# EAGLE board test_stmsize (EAGLE 6.6.0)
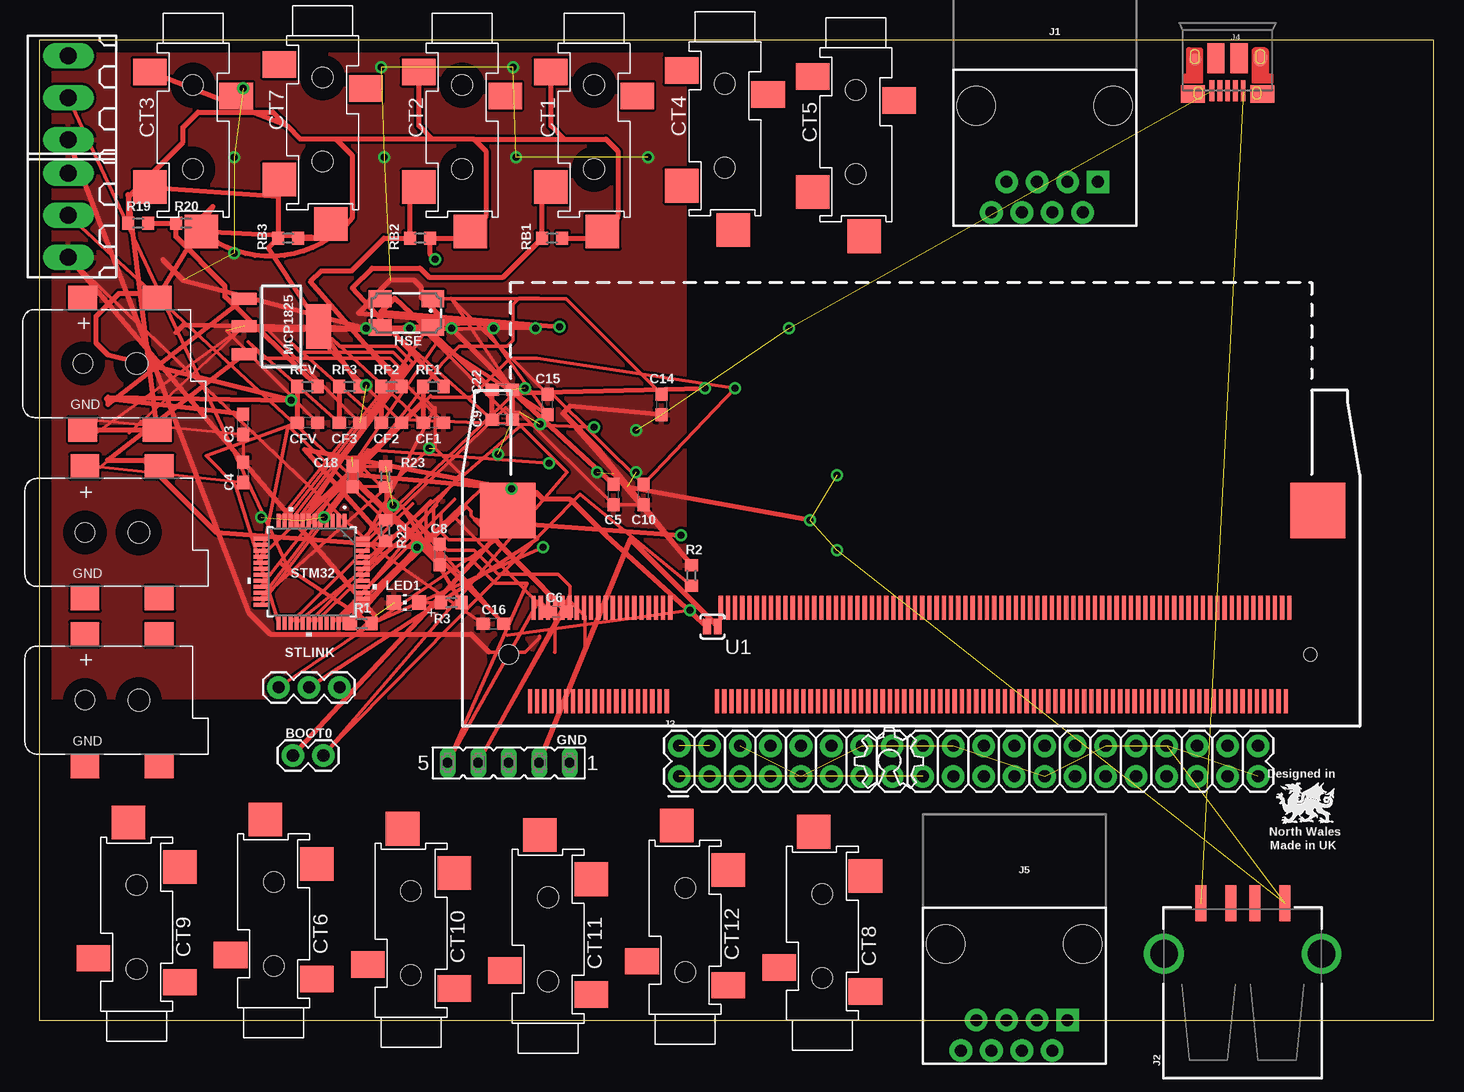
[diagram p0: board, top side]
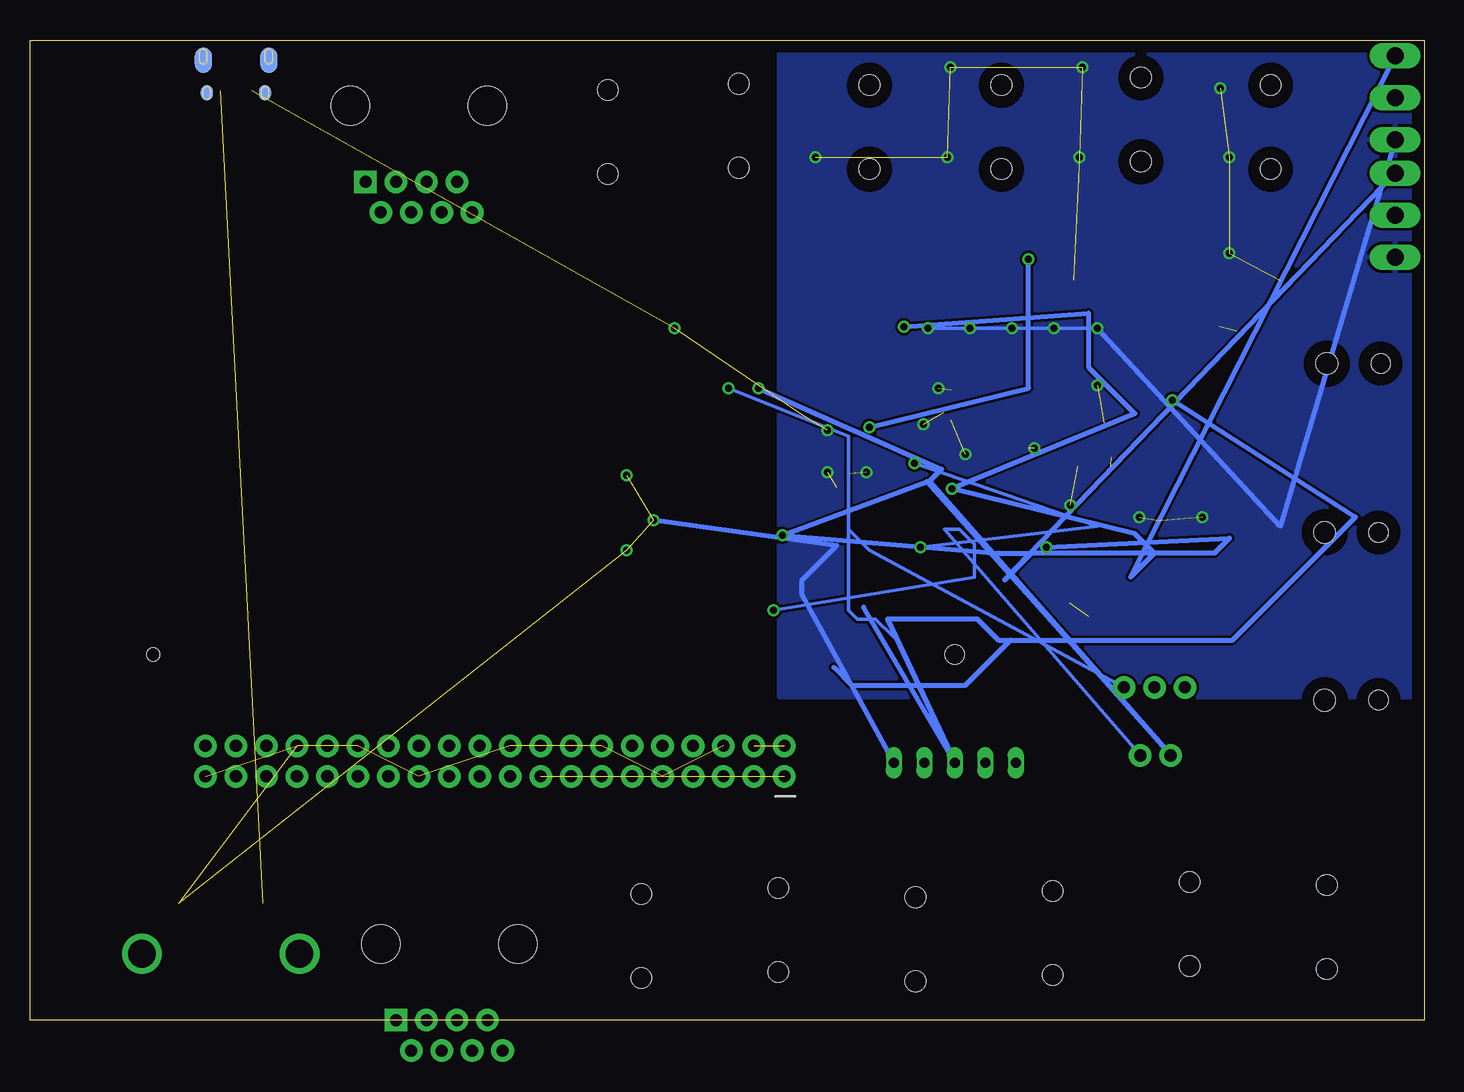
[diagram p1: board, bottom side, seen from below]

Size 116.23 x 81.67 mm. Coordinates in mm from the lower left corner, seen from the top.
Outline: 0,0 116.23,0 116.23,81.67 0,81.67 0,0
Copper layers (1*16): Top 0.035mm / dielectric 1.5mm / Bottom 0.035mm
Design rules "default *": minimum track width 10mil, minimum drill 24mil, track to track 8mil, track to pad 8mil, pad to pad 8mil, via to via 8mil, smd to smd 8mil, copper to edge 40mil, drill to drill 8mil, minimum pad ring 10mil, minimum via ring 8mil, stop-mask expansion 4mil, vias tented up to drill 0.6mm, thermal gap 10mil
Net classes: 0 default: width 0.203 mm, drill 0.6 mm, clearance 0.203 mm; 1 power: width 0.381 mm, drill 0.6 mm, clearance 0.254 mm; 2 gnd: width 0.254 mm, drill 0.6 mm, clearance 0.254 mm

## Footprints (pad centres in the part's own frame; a part is rotated, then mirrored left to right if it is on the bottom)
1X02 = drill 1.016 pad 1.88: 1 0,0; 2 2.54,0
C0603 = smd 1.1 x 1: 1 -0.85,0; 2 0.85,0
STEREO_SMT = smd 2.8 x 2.2: P$1 -3.6,-2.4; P$3 3.6,-4.4 | smd 2.8 x 2.8: P$2 -3.6,-12; P$4 0.7,-15.7 | hole 1.7: 0,-3.5; 0,-10.5
180-3 = drill 1.422 long: 1 -3.5,0; 2 0,0; 3 3.5,0
FE05-1 = drill 0.813 long: 1 -5.08,0; 2 -2.54,0; 3 0,0; 4 2.54,0; 5 5.08,0
CTS406 = smd 1.9 x 1.4: 1 -2.2,-1.2; 2 2.2,-1.2; 3 2.2,1.2; 4 -2.2,1.2
RJ45-8 = drill 1 pad 1.88 square: 1 -4.445,6.35 | drill 1 pad 1.88: 2 -3.175,8.89; 3 -1.905,6.35; 4 -0.635,8.89; 5 0.635,6.35; 6 1.905,8.89; 7 3.175,6.35; 8 4.445,8.89 | hole 3.2: -5.715,0; 5.715,0
USB-A-S-SILK-FEMALE = smd 3 x 0.9: D+ 7.212,-1; D- 7.212,1; GND 7.212,-3.5; VBUS 7.212,3.5 | drill 2.311: SHLD1 3,-6.566; SHLD2 3,6.566
2X20 = drill 1.016 pad 1.88: 1 0,0; 2 0,2.54; 3 2.54,0; 4 2.54,2.54; 5 5.08,0; 6 5.08,2.54; 7 7.62,0; 8 7.62,2.54; 9 10.16,0; 10 10.16,2.54; 11 12.7,0; 12 12.7,2.54; 13 15.24,0; 14 15.24,2.54; 15 17.78,0; 16 17.78,2.54; 17 20.32,0; 18 20.32,2.54; 19 22.86,0; 20 22.86,2.54; 21 25.4,0; 22 25.4,2.54; 23 27.94,0; 24 27.94,2.54; 25 30.48,0; 26 30.48,2.54; 27 33.02,0; 28 33.02,2.54; 29 35.56,0; 30 35.56,2.54; 31 38.1,0; 32 38.1,2.54; 33 40.64,0; 34 40.64,2.54; 35 43.18,0; 36 43.18,2.54; 37 45.72,0; 38 45.72,2.54; 39 48.26,0; 40 48.26,2.54
USB-MICROB-PTH-MILL = smd 0.4 x 1.75: D+ 0,0; D- -0.65,0; GND 1.3,0; ID 0.65,0; VBUS -1.3,0 | smd 2 x 1.46: SHIELD -2.9,0.275; SHIELD2 2.9,0.275 | smd 1.425 x 2.5: SHIELD3 -0.963,-2.675; SHIELD4 0.963,-2.675 | smd 1.4 x 2.1 bottom: SHIELD5 -2.731,-2.531; SHIELD7 2.729,-2.531 | smd 1 x 1: SHIELD6 2.7,-2.575 | smd 1.1 x 1.5: SHIELD8 -2.731,-2.731 | smd 1 x 1.3 bottom: SHIELD9 -2.43,0.195; SHIELD10 2.43,0.195
CHIP-LED0805 = smd 1.2 x 1.2: A 0,-1.05; C 0,1.05
SOT-223 = smd 1 x 2.1: 1 -2.3,-3.1; 2 0,-3.1; 3 2.3,-3.1 | smd 3.7 x 2.1: 4 0,3.1
R0603 = smd 1 x 1.1: 1 -0.85,0; 2 0.85,0
SJ_2S-NO = smd 0.635 x 1.27: 1 -0.45,0; 2 0.45,0
1X03 = drill 1.016 pad 1.88: 1 0,0; 2 2.54,0; 3 5.08,0
LQFP48-7X7MM = smd 1.194 x 0.305: 1 -4.25,2.75; 2 -4.25,2.25; 3 -4.25,1.75; 4 -4.25,1.25; 5 -4.25,0.75; 6 -4.25,0.25; 7 -4.25,-0.25; 8 -4.25,-0.75; 9 -4.25,-1.25; 10 -4.25,-1.75; 11 -4.25,-2.25; 12 -4.25,-2.75; 25 4.25,-2.75; 26 4.25,-2.25; 27 4.25,-1.75; 28 4.25,-1.25; 29 4.25,-0.75; 30 4.25,-0.25; 31 4.25,0.25; 32 4.25,0.75; 33 4.25,1.25; 34 4.25,1.75; 35 4.25,2.25; 36 4.25,2.75 | smd 0.305 x 1.194: 13 -2.75,-4.25; 14 -2.25,-4.25; 15 -1.75,-4.25; 16 -1.25,-4.25; 17 -0.75,-4.25; 18 -0.25,-4.25; 19 0.25,-4.25; 20 0.75,-4.25; 21 1.25,-4.25; 22 1.75,-4.25; 23 2.25,-4.25; 24 2.75,-4.25; 37 2.75,4.25; 38 2.25,4.25; 39 1.75,4.25; 40 1.25,4.25; 41 0.75,4.25; 42 0.25,4.25; 43 -0.25,4.25; 44 -0.75,4.25; 45 -1.25,4.25; 46 -1.75,4.25; 47 -2.25,4.25; 48 -2.75,4.25
SO-DIMM = smd 0.35 x 2: 1 -26.4,-3.9; 2 -26.1,3.9; 3 -25.8,-3.9; 4 -25.5,3.9; 5 -25.2,-3.9; 6 -24.9,3.9; 7 -24.6,-3.9; 8 -24.3,3.9; 9 -24,-3.9; 10 -23.7,3.9; 11 -23.4,-3.9; 12 -23.1,3.9; 13 -22.8,-3.9; 14 -22.5,3.9; 15 -22.2,-3.9; 16 -21.9,3.9; 17 -21.6,-3.9; 18 -21.3,3.9; 19 -21,-3.9; 20 -20.7,3.9; 21 -20.4,-3.9; 22 -20.1,3.9; 23 -19.8,-3.9; 24 -19.5,3.9; 25 -19.2,-3.9; 26 -18.9,3.9; 27 -18.6,-3.9; 28 -18.3,3.9; 29 -18,-3.9; 30 -17.7,3.9; 31 -17.4,-3.9; 32 -17.1,3.9; 33 -16.8,-3.9; 34 -16.5,3.9; 35 -16.2,-3.9; 36 -15.9,3.9; 37 -15.6,-3.9; 38 -15.3,3.9; 39 -15,-3.9; 40 -14.7,3.9; 41 -10.8,-3.9; 42 -10.5,3.9; 43 -10.2,-3.9; 44 -9.9,3.9; 45 -9.6,-3.9; 46 -9.3,3.9; 47 -9,-3.9; 48 -8.7,3.9; 49 -8.4,-3.9; 50 -8.1,3.9; 51 -7.8,-3.9; 52 -7.5,3.9; 53 -7.2,-3.9; 54 -6.9,3.9; 55 -6.6,-3.9; 56 -6.3,3.9; 57 -6,-3.9; 58 -5.7,3.9; 59 -5.4,-3.9; 60 -5.1,3.9; 61 -4.8,-3.9; 62 -4.5,3.9; 63 -4.2,-3.9; 64 -3.9,3.9; 65 -3.6,-3.9; 66 -3.3,3.9; 67 -3,-3.9; 68 -2.7,3.9; 69 -2.4,-3.9; 70 -2.1,3.9; 71 -1.8,-3.9; 72 -1.5,3.9; 73 -1.2,-3.9; 74 -0.9,3.9; 75 -0.6,-3.9; 76 -0.3,3.9; 77 0,-3.9; 78 0.3,3.9; 79 0.6,-3.9; 80 0.9,3.9; 81 1.2,-3.9; 82 1.5,3.9; 83 1.8,-3.9; 84 2.1,3.9; 85 2.4,-3.9; 86 2.7,3.9; 87 3,-3.9; 88 3.3,3.9; 89 3.6,-3.9; 90 3.9,3.9; 91 4.2,-3.9; 92 4.5,3.9; 93 4.8,-3.9; 94 5.1,3.9; 95 5.4,-3.9; 96 5.7,3.9; 97 6,-3.9; 98 6.3,3.9; 99 6.6,-3.9; 100 6.9,3.9; 101 7.2,-3.9; 102 7.5,3.9; 103 7.8,-3.9; 104 8.1,3.9; 105 8.4,-3.9; 106 8.7,3.9; 107 9,-3.9; 108 9.3,3.9; 109 9.6,-3.9; 110 9.9,3.9; 111 10.2,-3.9; 112 10.5,3.9; 113 10.8,-3.9; 114 11.1,3.9; 115 11.4,-3.9; 116 11.7,3.9; 117 12,-3.9; 118 12.3,3.9; 119 12.6,-3.9; 120 12.9,3.9; 121 13.2,-3.9; 122 13.5,3.9; 123 13.8,-3.9; 124 14.1,3.9; 125 14.4,-3.9; 126 14.7,3.9; 127 15,-3.9; 128 15.3,3.9; 129 15.6,-3.9; 130 15.9,3.9; 131 16.2,-3.9; 132 16.5,3.9; 133 16.8,-3.9; 134 17.1,3.9; 135 17.4,-3.9; 136 17.7,3.9; 137 18,-3.9; 138 18.3,3.9; 139 18.6,-3.9; 140 18.9,3.9; 141 19.2,-3.9; 142 19.5,3.9; 143 19.8,-3.9; 144 20.1,3.9; 145 20.4,-3.9; 146 20.7,3.9; 147 21,-3.9; 148 21.3,3.9; 149 21.6,-3.9; 150 21.9,3.9; 151 22.2,-3.9; 152 22.5,3.9; 153 22.8,-3.9; 154 23.1,3.9; 155 23.4,-3.9; 156 23.7,3.9; 157 24,-3.9; 158 24.3,3.9; 159 24.6,-3.9; 160 24.9,3.9; 161 25.2,-3.9; 162 25.5,3.9; 163 25.8,-3.9; 164 26.1,3.9; 165 26.4,-3.9; 166 26.7,3.9; 167 27,-3.9; 168 27.3,3.9; 169 27.6,-3.9; 170 27.9,3.9; 171 28.2,-3.9; 172 28.5,3.9; 173 28.8,-3.9; 174 29.1,3.9; 175 29.4,-3.9; 176 29.7,3.9; 177 30,-3.9; 178 30.3,3.9; 179 30.6,-3.9; 180 30.9,3.9; 181 31.2,-3.9; 182 31.5,3.9; 183 31.8,-3.9; 184 32.1,3.9; 185 32.4,-3.9; 186 32.7,3.9; 187 33,-3.9; 188 33.3,3.9; 189 33.6,-3.9; 190 33.9,3.9; 191 34.2,-3.9; 192 34.5,3.9; 193 34.8,-3.9; 194 35.1,3.9; 195 35.4,-3.9; 196 35.7,3.9; 197 36,-3.9; 198 36.3,3.9; 199 36.6,-3.9; 200 36.9,3.9 | smd 4.6 x 4.6: G1 -28.254,12; G2 39.27,12 | hole 1.6: -28.15,0 | hole 1.1: 38.65,0
DCJACK_2MM_SMT = smd 2.4 x 2: GND 0,-5.5; GNDBREAK 6.2,-5.5; PWR1 0,5.5; PWR2 6.2,5.5 | hole 1.6: 0,0 | hole 1.8: 4.5,0

## Placement (x,y rotation side)
BOOT0  [1X02]  23.68,22.06 180 top
C3  4.7uF  [C0603]  16.99,49.65 90 top
C4  4.7uF  [C0603]  16.99,45.65 270 top
C5  100nF  [C0603]  47.87,43.8 90 top
C6  100nF  [C0603]  43.12,34.05 0 top
C8  100nF  [C0603]  33.37,38.8 270 top
C9  100nF  [C0603]  38.62,50.05 180 top
C10  100nF  [C0603]  50.37,43.8 90 top
C14  18pF  [C0603]  51.87,51.3 270 top
C15  18pF  [C0603]  42.37,51.3 90 top
C16  100nF  [C0603]  37.87,33.05 0 top
C18  10uF  [C0603]  26.12,45.3 270 top
C22  1uF  [C0603]  38.62,52.55 180 top
CF1  100nF  [C0603]  32.87,49.8 180 top
CF2  100nF  [C0603]  29.37,49.8 180 top
CF3  100nF  [C0603]  25.87,49.8 180 top
CFV  100nF  [C0603]  22.37,49.8 180 top
CT1  STEREO_SMD  [STEREO_SMT]  46.25,81.42 0 top
CT2  STEREO_SMD  [STEREO_SMT]  35.25,81.42 0 top
CT3  STEREO_SMD  [STEREO_SMT]  12.82,81.42 0 top
CT4  STEREO_SMD  [STEREO_SMT]  57.15,81.53 0 top
CT5  STEREO_SMD  [STEREO_SMT]  68.07,81.03 0 top
CT6  STEREO_SMD  [STEREO_SMT]  19.56,1.02 180 top
CT7  STEREO_SMD  [STEREO_SMT]  23.62,82.04 0 top
CT8  STEREO_SMD  [STEREO_SMT]  65.28,0 180 top
CT9  STEREO_SMD  [STEREO_SMT]  8.13,0.76 180 top
CT10  STEREO_SMD  [STEREO_SMT]  30.99,0.25 180 top
CT11  STEREO_SMD  [STEREO_SMT]  42.42,-0.25 180 top
CT12  STEREO_SMD  [STEREO_SMT]  53.85,0.51 180 top
DS18B20  [180-3]  2.43,76.88 90 top
GND  UART  [FE05-1]  39.13,21.45 180 top
HSE  8MHZ  [CTS406]  30.61,58.92 180 top
J1  RJ45  [RJ45-8]  83.82,76.2 180 top
J2  USB_A_SMT_FEMALE  [USB-A-S-SILK-FEMALE]  100.33,2.54 90 top
J3  RASPBERRYPI-40-PIN-GPIO_PTH_NO_SHROUD  [2X20]  53.34,20.32 0 top
J4  [USB-MICROB-PTH-MILL]  99.06,77.47 180 top
J5  RJ45  [RJ45-8]  81.28,6.35 180 top
LED1  Red 1.85V  [CHIP-LED0805]  30.62,34.8 90 top
LOGO1  OSHW_LOGO_6MILX0200-NT  [OSHW_6X200_NOTEXT]  68.02,19.33 0 top
MCP1825  MCP1825SOT-223-3  [SOT-223]  20.18,57.81 270 top
PULSE  [180-3]  2.43,67.06 90 top
R1  4.7k  [R0603]  26.87,33.05 180 top
R2  10k  [R0603]  54.37,37.05 90 top
R3  1K  [R0603]  34.37,34.8 0 top
R19  10k  [R0603]  8.25,66.42 180 top
R20  120k  [R0603]  12.25,66.42 180 top
R22  10k  [R0603]  28.87,40.8 270 top
R23  10k  [R0603]  28.87,45.3 270 top
RB1  22r  [R0603]  42.75,65.17 0 top
RB2  22r  [R0603]  31.75,65.17 0 top
RB3  22r  [R0603]  20.75,65.17 0 top
RF1  330R  [R0603]  32.87,52.8 180 top
RF2  330R  [R0603]  29.37,52.8 180 top
RF3  330R  [R0603]  25.87,52.8 180 top
RFV  330R  [R0603]  22.37,52.8 180 top
SJ1  SOLDERJUMPERNO  [SJ_2S-NO]  56.12,32.8 180 top
STLINK  [1X03]  19.95,27.74 0 top
STM32  STM32F302_303C2  [LQFP48-7X7MM]  22.71,37.37 270 top
U1  COMPUTE_MODULE  [SO-DIMM]  67.31,30.48 0 top
U$1  2.1MMJACKSMT  [DCJACK_2MM_SMT]  3.63,54.72 0 top
U$2  2.1MMJACKSMT  [DCJACK_2MM_SMT]  3.81,40.64 0 top
U$3  2.1MMJACKSMT  [DCJACK_2MM_SMT]  3.81,26.67 0 top

## Library data of the parts
BOOT0 SJ1 STLINK = SparkFun
C3-C6 C8-C10 C14-C16 C18 C22 CF1-CF3 CFV R1 R2 R19 R20 R22 R23 RB1-RB3 RF1-RF3 RFV = resistor
CT1-CT12 = IotaWatt_parts
DS18B20 PULSE = con-weidmueller-sl35; OC_FARNELL: unknown; OC_NEWARK: unknown
GND = con-lsta; OC_FARNELL: unknown; OC_NEWARK: unknown
HSE = crystal; OC_FARNELL: unknown; OC_NEWARK: unknown
J1 J5 = SparkFun-Connectors; PROD_ID: CONN-08506; SF_ID: PRT-00643
J2 = SparkFun-Connectors; PROD_ID: CONN-09520; SF_ID: PRT-09011
J3 = SparkFun-Connectors
J4 = SparkFun-Connectors; PROD_ID: CONN-13711
LED1 U$1-U$3 = adafruit
LOGO1 = ohw-logo
MCP1825 = SteelCaveRobotics-Power
R3 = rcl
STM32 = stm32f303cb; MANUFACTURER_PART_NUMBER: stm32f302_303c2; VENDOR: STMicroelectronics
U1 = raspberrypi_cm

## Nets
3.3V: J3.1 J3.17
5V: J3.2 J3.4
+3V3: BOOT0.2 C4.2 C5.2 C6.2 C8.2 C9.2 C22.2 DS18B20.3 MCP1825.3 PULSE.3 R1.2 R22.2 SJ1.2 STM32.9 STM32.24 STM32.36 STM32.48
+5V: C3.2 GND.3 MCP1825.1
AC: R20.1 U$1.PWR2
ADC0: R19.1 R20.2 RFV.1
BIAS: CT1.P$1 CT1.P$4 CT2.P$1 CT2.P$4 CT3.P$1 CT3.P$4 R19.2 RB1.2 RB2.2 RB3.2 STM32.16 U$1.GND U$1.GNDBREAK
BIAS_IN: C18.2 R22.1 R23.2 STM32.17
BOOT0: BOOT0.1 R2.1 STM32.44
CT1: CF1.2 RF1.2 STM32.10
CT2: CF2.2 RF2.2 STM32.11
CT3: CF3.2 RF3.2 STM32.12
DS18B20: DS18B20.2 R1.1 STM32.21
GND: C3.1 C4.1 C5.1 C6.1 C8.1 C9.1 C10.1 C14.2 C15.2 C16.1 C18.1 C22.1 CF1.1 CF2.1 CF3.1 CFV.1 DS18B20.1 GND.1 J2.GND J3.6 J3.9 J3.14 J3.20 J3.25 J3.30 J3.34 J3.39 J4.GND LED1.C MCP1825.2 PULSE.1 R2.2 R23.1 STM32.8 STM32.23 STM32.35 STM32.47
HSE_IN: C14.1 HSE.1 STM32.5
HSE_OUT: C15.1 HSE.3 STM32.6
LED: R3.2 STM32.27
LSE_IN: STM32.3
LSE_OUT: STM32.4
N$1: GND.2 SJ1.1
N$2: CT1.P$2 RB1.1 RF1.1
N$8: CT2.P$2 RB2.1 RF2.1
N$10: CT3.P$2 RB3.1 RF3.1
N$41: LED1.A R3.1
NRST: C10.2 STLINK.3 STM32.7
PULSE: C16.2 PULSE.2 STM32.28
SWCLK: STLINK.2 STM32.37
SWDIO: STLINK.1 STM32.34
UART_RX: GND.4 STM32.31
UART_TX: GND.5 STM32.30
VBAT: STM32.1
VBUS: J2.VBUS J4.VBUS
VSIG: CFV.2 RFV.2 STM32.25

## Tracks (layer width: path | path; a pad name or v marks a point on that pad's centre or on a via)
3.3V  (1 unrouted)
5V  (1 unrouted)
+3V3  (via drill 0.6)
  Top 0.254: C4.2 5.1,46.07 MCP1825.3
  Top 0.305: STM32.9 31.62,55.3 30.15,56.77 C9.2 | STM32.36 35.62,42.8 36,42.42 36,42.02 C6.2 | STM32.48 38.88,51.55 39.25,51.92 | C5.2 39.88,51.92 40.25,52.28 | STM32.24 27.12,46.05 26.75,45.67 25.85,45.67 C8.2
  Top 0.406: MCP1825.3 5.7,46.67 8.75,46.67 14.75,40.67 v31.49,39.4 R1.2 | C8.2 25.73,45.55 v39.37,44.28 22.1,47.57 R22.2 | v43.37,57.78 28.5,59.05 29.62,60.17 C22.2 C9.2 | 40.25,52.28 v55.49,52.65 | BOOT0.2 41.46,43.96 42,43.42 44.25,43.42 47.25,40.42 SJ1.2 | 39.25,51.92 39.6,52.27 C5.2 | C6.2 36.37,41.69 36.39,41.67 v53.49,40.4
  Bottom 0.406: v31.49,39.4 16.25,40.17 17.5,38.92 22.5,38.92 | 22.5,38.92 24.5,36.92 DS18B20.3 | 22.5,38.92 32.75,38.92 | 32.75,38.92 35,36.67 PULSE.3 | 22.5,38.92 24.12,40.55 v39.37,44.28 24.12,50.55 28,54.42 28,58.92 v43.37,57.78 | 32.75,38.92 35.5,38.92 v53.49,40.4 41.46,44.88 BOOT0.2 41.25,44.92 40.25,45.92 v55.49,52.65
+5V  (via drill 0.6)
  Top 0.406: 8.62,60.55 6.62,60.55 4.75,58.67 4.75,56.42 5.75,55.42 v20.99,51.65 5.75,51.92 | MCP1825.1 5.75,51.32 5.75,51.92 | C3.2 5.6,51.77 5.75,51.92
  Bottom 0.406: 46.75,34.42 GND.3 44.75,33.42 37.25,33.42 35.5,31.67 34.5,31.67 | 34.5,31.67 16,31.67 5.75,41.92 v20.99,51.65 | 49.23,29.4 47.75,27.92 38.25,27.92 34.5,31.67
AC
  Top 0.406: R20.1 14.5,67.82 U$1.PWR2
ADC0
  Top 0.406: R19.1 R20.2 11.4,65.27 15.5,61.17 15.5,60.27 RFV.1
BIAS  (via drill 0.6)
  Top 0.305: STM32.16 30.38,50.05 v46.24,49.4
  Top 0.406: 30.75,79.92 CT2.P$1 | CT2.P$1 32.55,79.92 | CT2.P$4 37.1,64.57 37.1,66.77 37.25,66.92 | 36.25,73.42 43.75,73.42 | 43.75,73.42 47.25,73.42 48.25,72.42 48.25,67.02 CT1.P$4 47.05,65.72 | 47.05,65.72 46.5,65.17 RB1.2 | 36.25,73.42 37.25,72.42 37.25,67.02 CT2.P$4 | 36.25,73.42 32.75,73.42 | 32.75,73.42 24.75,73.42 | 24.75,73.42 21.75,73.42 20.65,74.52 | 24.75,73.42 26.1,72.07 26.1,66.87 arc-90 CT3.P$4 24.4,65.17 RB3.2 | 32.75,73.42 31.65,74.52 CT2.P$1 | 43.75,73.42 42.65,74.52 CT1.P$1 | CT2.P$4 35.4,65.17 RB2.2 32.6,63.82 v33,63.42 | 20.65,74.52 CT3.P$1 | 48.25,66.92 47.05,65.72 | U$1.GND U$1.GNDBREAK 7.4,68.82 R19.2 7.5,66.52 7.5,68.67 12,73.17 12,74.42 13.25,75.67 19.5,75.67 20.65,74.52
  Bottom 0.406: v46.24,49.4 33,52.67 v33,63.42
BIAS_IN
  Top 0.254: C18.2 R23.2 R22.1
  Top 0.305: STM32.17 20.75,49.55 R22.1
BOOT0  (via drill 0.6)
  Top 0.305: STM32.44 40.12,49.55 44,45.67 BOOT0.1 45.1,43.82 R2.1 | v54.24,34.15 39,32.09
  Bottom 0.305: BOOT0.1 40,40.92 38.75,40.92 37.5,39.67 37.5,36.92 v54.24,34.15
CT1
  Top 0.305: CF1.2 24.4,56.77 25,56.17 29.75,56.17 31.12,54.8 STM32.10
  Top 0.406: RF1.2 CF1.2
CT2
  Top 0.305: CF2.2 20.9,56.52 21.75,55.67 29.5,55.67 30.62,54.55 STM32.11
  Top 0.406: RF2.2 CF2.2
CT3
  Top 0.305: CF3.2 17.4,56.52 18.75,55.17 29.25,55.17 30.12,54.3 STM32.12
  Top 0.406: RF3.2 CF3.2
DS18B20  (via drill 0.6)
  Top 0.305: DS18B20.2 21,37.17 20.1,38.07 R1.1 v41.99,39.4 | STM32.21 27.38,47.55 v42.49,46.4
  Bottom 0.305: v42.49,46.4 27.25,41.17 v41.99,39.4
GND  (via drill 0.6)  (35 unrouted)
  Top 0.254: C18.1 R23.1 | C4.1 C3.1 3.6,50.07 4.75,48.92 MCP1825.2 7.5,48.92 8.5,49.92
  Top 0.305: C9.1 32.12,57.4 STM32.8 32.12,51.8 32.88,51.05 33,51.05 | C22.1 34.35,60.17 C15.2 | C6.1 34.75,41.77 34.75,42.42 35.12,42.8 STM32.35 35.12,45.55 33,47.67 33,48.17 | C10.1 C5.1 40.02,50.67 39.25,50.67 38.88,51.05 STM32.47 33,51.05 | C8.1 26.1,46.92 26.75,46.92 27.12,46.55 STM32.23 31.38,46.55 33,48.17 | 33,48.17 33,51.05 | PULSE.1 28,39.27 C16.1 | 41.69,31.98 41.69,31.86 40.5,30.67 37.5,30.67 | CF1.1 26.12,57.45 v41.37,57.65 | CF2.1 22.62,57.45 v37.87,57.65 | CFV.1 15.62,57.45 v30.86,57.65 | CF3.1 19.12,57.45 v34.37,57.65
  Top 0.406: C14.2 44.25,51.17 43.65,50.57 | 43.65,50.57 C10.1 | 10.3,63.37 12,61.67 v27.24,57.65 12,57.92 11.4,57.32 | 43.65,50.57 46.75,47.47 R2.2 47.9,45.52 49,44.42 v64.24,41.65 | 26.5,32.17 19.25,32.17 17.5,33.92 DS18B20.1 | 26.5,32.17 36,32.17 37.5,30.67 | PULSE.1 28,33.67 26.5,32.17 | v41.37,57.65 26.62,58.92 27.25,59.55 27.25,59.67 29.25,61.67 31.25,61.67 31.88,61.05 31.88,60.2 C22.1 C9.1
  Bottom 0.305: v27.24,57.65 v30.86,57.65 v34.37,57.65 v37.87,57.65 v41.37,57.65
  Bottom 0.406: GND.1 51.88,35.47 51.88,36.67 49,39.55 v64.24,41.65 | DS18B20.1 12,41.17 v27.24,57.65
  other vias: 62.49,57.65 32.49,47.65 49.74,45.65 40.49,52.65 41.74,49.65 29.49,42.9 66.49,45.4 16.25,63.92 16.25,71.92 17,77.67 28.75,71.92 39.75,71.92 50.75,71.92 28.5,79.42 39.5,79.42 23.74,41.9 27.24,52.9 18.49,41.9 49.74,49.15 46.49,45.65 66.49,39.15 38.24,47.15
  pour Top: 0.25,81.42 53.75,81.42 53.75,26.92 0.25,26.92
  pour Bottom: 0.25,81.42 0.25,26.92 53.75,26.92 53.75,81.42
HSE_IN
  Top 0.305: STM32.5 33.62,54.8 35,56.17 39,56.17 39.5,56.67 39.5,59.67 40,60.17 41.65,60.17 HSE.1 43.9,60.12 C14.1
HSE_OUT
  Top 0.305: STM32.6 33.12,56.45 C15.1 36.95,58.07 HSE.3
LED
  Top 0.305: STM32.27 31.12,43.05 30.5,42.42 R3.2
N$1
  Top 0.406: GND.2 49.29,40.08 SJ1.1
N$2
  Top 0.406: CT1.P$2 41.9,68.67 RB1.1 38.65,61.92 32.5,61.92 31.75,62.67 27.75,62.67 26.1,61.02 RF1.1
N$8
  Top 0.406: CT2.P$2 30.9,68.67 RB2.1 28.75,65.17 26,62.42 23.5,62.42 22.6,61.52 RF2.1
N$10
  Top 0.406: RF3.1 19.1,64.37 RB3.1 19.9,68.67 CT3.P$2
N$41
  Top 0.305: LED1.A R3.1
NRST  (via drill 0.6)
  Top 0.305: STM32.7 32.62,52.05 32.75,51.92 36,51.92 39.25,55.17 41.5,55.17 v57.99,52.65 C10.2 42.65,52.27
  Bottom 0.305: 44.27,31.94 45.75,33.42 47.25,33.42 48,34.17 48,40.92 | v57.99,52.65 48,48.67 48,40.92 | STLINK.3 46.25,39.17 48,40.92
PULSE
  Top 0.305: 31.5,40.57 C16.2 | PULSE.2 31.5,40.27 C16.2 | C16.2 31.62,41.2 STM32.28
SWCLK
  Top 0.305: STM32.37 37.12,44.55 41.54,40.13 STLINK.2
SWDIO
  Top 0.305: STM32.34 34.62,43.42 33.5,42.3 33.5,40.67 34.12,40.05 38.12,40.05 STLINK.1
UART_RX
  Top 0.305: 45.5,30.67 45.5,33.67 44.21,34.96 GND.4 44.25,35.46 44.25,36.17 43.25,37.17 38.25,37.17 36.25,39.17 34,39.17 32.88,40.3 32.88,42.67 33.12,42.92 STM32.31
UART_TX
  Top 0.305: 42.96,30.67 43,30.67 43,33.67 41.67,35 GND.5 40.67,36.42 38,36.42 36,38.42 33.75,38.42 32.25,39.92 32.25,42.92 32.62,43.3 STM32.30
VBUS  (1 unrouted)
VSIG
  Top 0.305: CFV.2 13.9,47.02 16.38,44.55 STM32.25
  Top 0.406: RFV.2 CFV.2

## Text on the board
tPlace: Designed in | North Wales | Made in UK
tValues: DIO | CLK | RST | emonSTM32 | v0.1 | Development Board | OpenEnergyMonitor | TX | RX | 5V | 3.3 | GND | T | 3V3 | GND | P | 3V3 | Open-Hardware | DS18B20 | PULSE INPUT